# Altium PCB python project v2.0.PcbDoc (part 2 of 2)
Units mil, origin at the board's own origin, x right, y up, seen from the top; angles counter-clockwise.
Board outline 4842.52 x 1803.15 mil, 8 copper layers (L1, L2, L3(GND), L4(PWR), L5(GND), L6, L7, L8), stack 66.302 mil thick; 259 components, 287 nets, 1829 pads, 135 vias.
Unrouted connection lines stored in the file: 99.
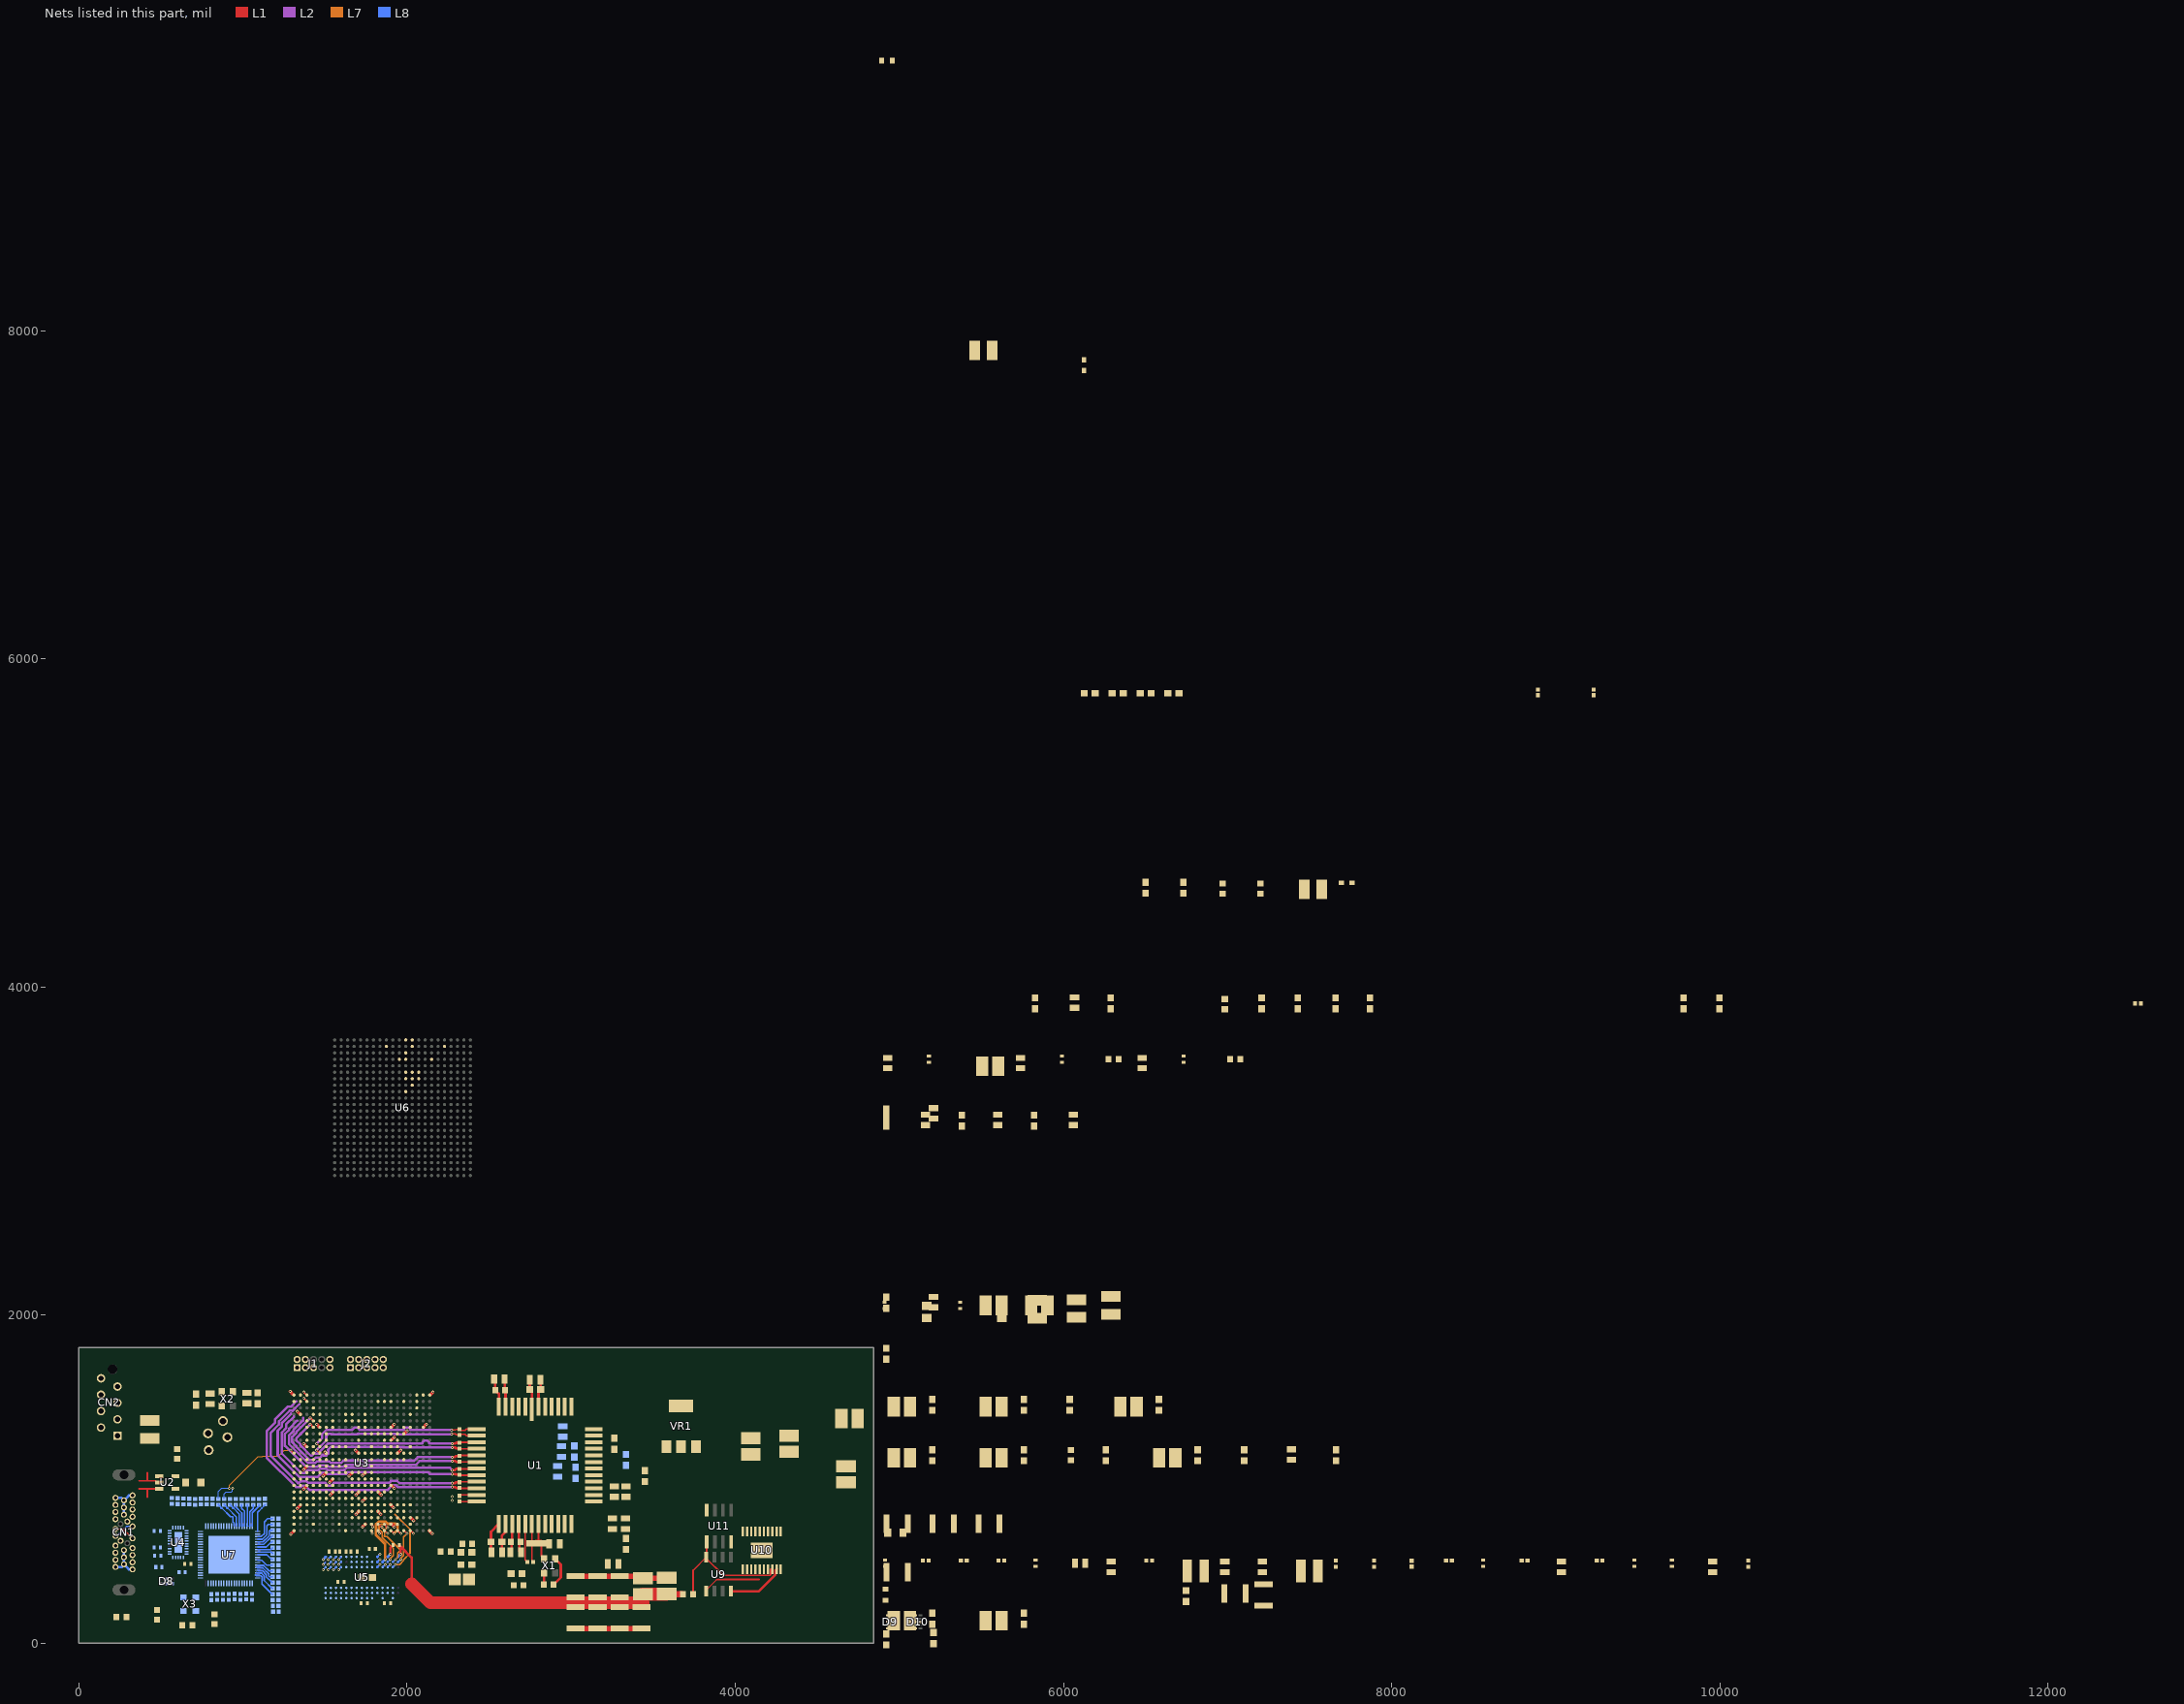
[diagram p7: the nets of this part, all layers, seen from the top]

## Part data
C1 C2 C7 C14 C22 C24 C26 C29 C31 C33 C38 C40 C41 C42 C43 C44 C45 C46 C47 C49 C54 C62 C64 C66 C68 C75 C76 C80 C81 C84 C85 C86 C87 C89 C91 C93 C96 C98 C105 C106 C111 C113 C115 C117 C119 C120 C121 C125 C126 C127 C128 C133 C135 C136 C145 C150 C159 C161 C162 C164 C170 C173 C176 C177 C180 C184 C186 L1 L2 L3 L4 L6 L7 L8 L9 L10 L11 L12 TP1 TP2 TP3 TP4 U2 X3: library part Component_1
  C1 C2 C7 C14 C22 C26 C29 C31 C33 C38 C40 C62 C80 C89 C91 C93 C96 C98 C106 C111 C135 C136 C145 C159 C161 C162 C164 C170 C173 C176 C177 C180 C184 C186: Buying URL=https://uk.farnell.com/avx/0603yc105kat2a/cap-1-f-16v-10-x7r-0603/dp/1658870RL?st=1u%200603, PCB Layer=0603
  C24 C41 C42 C81 C150: PCB Layer=CASEB
  C44 C45 C46 C47: Buying URL=https://uk.farnell.com/avx/06031c104kat2a/cap-0-1-f-100v-10-x7r-0603/dp/2749806?st=100nf, PCB footprint=0603
  C49 C54 C64 C66 C68 C75 C76 C84 C85 C86 C87 C113 C115 C117 C119 C120 C121 C125 C126 C127 C133: Buying URL=https://uk.farnell.com/avx/04023c104kat2a/cap-0-1-f-25v-10-x7r-0402/dp/1867948RL, PCB Stake=0402
  C105: Buying URL="NEED TO BE ADDED", PCB footprint=0805
  C128: Buying URL=https://uk.farnell.com/avx/04023c104kat2a/cap-0-1-f-25v-10-x7r-0402/dp/1867948RL
  L1 L2 L8 L9 L11 L12: Buying URL=https://uk.farnell.com/tdk/mlz1608m100wt/inductor-10uh-20-shielded/dp/2215635?st=10uH%200603, PCB Layout=0603
  L3: =IHLP5050-01, Buying URL=https://www.mouser.co.uk/ProductDetail/Coilcraft/XFL4015-471MEC?qs=zCSbvcPd3pYzCOJSVbeMnw==
  L4 L10: Buying URL=https://uk.farnell.com/murata/blm18pg330sn1d/ferrite-bead-0-025ohm-3a-0603/dp/1515742?st=Ferrite%2033R/100MHz,%2025%25,%203A,%2025mR,%200603
  L6 L7: Buying URL=https://www.mouser.co.uk/ProductDetail/Coilcraft/XFL4015-471MEC?qs=zCSbvcPd3pYzCOJSVbeMnw==
  TP1 TP2 TP3 TP4: Buying URL=https://www.toby.co.uk/pcb-hardware/test-points-and-pins/test-7cn-valcon-ceramic-body-loop-pcb-test-points/
  U2: Buying URL=https://uk.farnell.com/texas-instruments/tps73218dbvt/ldo-fixed-1-8v-150ma-sot-23-5/dp/2323599RL?st=TPS73218, PCB Footprint type=SOT23-5
  X3: Buying URL=https://uk.rs-online.com/web/p/crystal-units/9047562/, MF=ABM8G-30.000MHZ-18-D2Y-T, mf Company=ABM8G
C3 C4 C5 C8 C12 C15 C20 C25 C28 C30 C32 C37 C39 C59 C63 C67 C69 C70 C71 C72 C90 C92 C94 C95 C97 C112 C114 C116 C144 C185 C187: library part Component_1, PCB Package=0805, Buying URL=https://uk.farnell.com/avx/08053d475kat2a/cap-4-7-f-25v-10-x5r-0805/dp/1657932?st=4.7u%200805
C6 C11 C13 C18 C21 C23 C27 C36: library part Component_1, PCB Package type=0603, Buying URL=https://uk.farnell.com/murata/grm188r71h104ka93d/cap-0-1-f-50v-10-x7r-0603-reel/dp/2408527?st=GRM188R71H104KA93D
C9 C19 C34 C35 C118 C146 C147 C148 C149 C156 C160 C165 C172 C175 C179 C182 C183: library part Component_1, CASE="CASE B"
  C9 C19 C34 C35 C118 C146 C149 C156 C160 C165 C172 C175 C179 C182 C183: Buying URL=https://uk.farnell.com/avx/tajb107k006tnj/cap-tant-aec-q200-100uf-6-3v-case/dp/2893386?st=100u%20CASE%20B
  C147 C148: Buying URL=https://uk.farnell.com/panasonic-electronic-components/4tpe150mazb/cap-150-f-4v-20/dp/2354853?st=4TPC150M#
C16: library part Component_1, CASE Type=CASEA, Buying URL=https://uk.farnell.com/kemet/t491a106m004at/cap-tantalum-10uf-4v-case-a/dp/2676170?st=T491A106M004AT
C77 C78 C99 C100 C107 C108 C109 C110 C122 C138 C140 C142 C157: library part Component_1, PCB Package type=1210
CN1: library part 1-2295018-2, "Connector USB Type C RCP SMD 24 Terminal workable with USB 3.1,3.0 and 2.0 standards.", PCB Package type="smd USB type C connector", 3D Model=NA, Buying URL=https://uk.farnell.com/te-connectivity/1-2295018-2/usb-connector-3-1-type-c-rcpt/dp/2568946?st=USB%20TYPE%20C, Company=PhasePhotonics, Datasheet URL=http://www.farnell.com/datasheets/2292385.pdf?_ga=2.46605921.752270131.1548443175-886242363.1545409715&_gac=1.159200584.1547824021.Cj0KCQiAj4biBRC-ARIsAA4WaFgEVxY1DDQMjPmwclte-08yP6TbUPRUf-iJ2mTW08_wstvQJToLRRUaArGKEALw_wcB, Date created=30/01/2019, Designed by="Faheem Minhas", Last modified=30/01/2019, MF="TE Connectivity", MP=1-2295018-2, PCB footprint URL=https://www.snapeda.com/parts/1-2295018-2/TE%20Connectivity%20AMP%20Connectors/view-part/?ref=snap, Price="4.29 pound", TE_purchase_URL=https://www.te.com/usa-en/product-1-2295018-2.html?te_bu=Cor&te_type=disp&te_campaign=seda_glo_cor-seda-global-disp-prtnr-fy19-seda-model-bom-cta_sma-317_1&elqCampaignId=32493
CN2: library part Conn_TE_7-215079-8_eec, "CONN FMALE-ON-BRD 8POS VERT T/H", Buying URL=https://uk.farnell.com/amp-te-connectivity/7-215079-8/receptacle-idc-1-27mm-8way/dp/148593
D1: Color=Green, Forward Voltage="2.1 V", Manufacturer=KingBright, Manufacturer Part No.=KP-2012MGC, Creator="Ritesh Kanjee", Datasheet URL=http://za.rs-online.com/web/p/visible-leds/4663778/, Date created="18 February 2015", RS Stock No.=466-3778
D2: Color=Orange, Forward Voltage=1.85V, Manufacturer=KingBright, Manufacturer Part No.=KP-2012SEC, Creator="Ritesh Kanjee", Datasheet URL=http://za.rs-online.com/web/p/visible-leds/4663790/, Date created="18 February 2015", RS Stock No.=466-3790
D8 D9 D10: library part Component_1, Package Type=DQAR, Company="TEXES INSTRUMENTS", mf no.=TPD4E02B04DQAR
FB1 FB2 FB3: library part Component_1, Package Type=0402, Buying URL=https://uk.farnell.com/murata/blm15ax100sn1d/ferrite-bead-0402-0-015ohm-1-74a/dp/2443220?st=BLM15AX100SN1D
J1 J2: "IDC LOW PRO HDR 10P VERT HT BLACK", MF=hARWIN, MP=M50-3500542
R1 R3 R4 R16 R17 R19 R20 R21 R22 R23 R24 R28 R29 R30 R31 R62 R63 R67 R68: library part RP73D1J76R8BTDG, "Res Thin Film 0603 76.8 Ohm 0.1% 1/10W ±15ppm/°C Molded SMD Paper T/R", Package="0603 TE Connectivity / AMP", Availability=Unavailable, Design by=Faheem, MF="TE Connectivity / Holsworthy", MP=RP73D1J76R8BTDG, Price=None, SnapEDA_Link=https://www.snapeda.com/parts/RP73D1J76R8BTDG/TE%20Connectivity%20/%20Holsworthy/view-part/?ref=snap
  R1 R4 R28 R29 R30 R31: Buying URL=https://uk.farnell.com/vishay/crcw060347k0fkea/res-47k-1-0-1w-0603-thick-film/dp/1469811?st=47K%200603, foot print=0603
  R3: Buying URL=https://uk.farnell.com/vishay/crcw060347k0fkea/res-47k-1-0-1w-0603-thick-film/dp/1469811?st=47K%200603, foot print=2X0603
  R16 R67 R68: Buying URL=https://uk.farnell.com/vishay/crcw060310k0fkea/res-10k-1-0-1w-0603-thick-film/dp/1469748?st=CRCW060310K0FKEA, foot print=2X0603
  R17 R24: Buying URL=https://uk.farnell.com/vishay/crcw060310k0fkea/res-10k-1-0-1w-0603-thick-film/dp/1469748?st=CRCW060310K0FKEA, foot print=0603
  R19 R20 R21 R22: Buying URL=https://uk.farnell.com/vishay/crcw060310k0fkea/res-10k-1-0-1w-0603-thick-film/dp/1469748?st=CRCW060310K0FKEA, foot print=0402
  R23 R63: Buying URL=https://uk.farnell.com/te-connectivity/crgh0603f4k7/res-4k7-1-0-2w-0603-thick-film/dp/2332011?st=4.7K%200603, foot print=0603
  R62: Buying URL=https://uk.farnell.com/te-connectivity/crgh0603f4k7/res-4k7-1-0-2w-0603-thick-film/dp/2332011?st=4.7K%200603, foot print=2X0603
R2 R5 R6 R7 R8 R9 R10 R11 R12 R13 R14 R15 R18 R25 R26 R27 R33 R34 R35 R36 R37 R38 R39 R40 R41 R42 R43 R44 R45 R46 R47 R48 R49 R50 R51 R52 R53 R54 R55 R56 R57 R58 R59 R60 R61 R70 R71 R72 R73 R74 R75 R76 R77 R78 R79 R80 R81 R82 R83 R84 R85 R86: library part RP73D1J76R8BTDG, "Res Thin Film 0603 76.8 Ohm 0.1% 1/10W ±15ppm/°C Molded SMD Paper T/R", =YAGO, Buying URL=https://uk.farnell.com/yageo/rc0402fr-07100rl/res-100r-1-0-0625w-0402-thick/dp/9239111
  R2 R5 R6 R7 R8 R9 R10 R11 R12 R13 R14 R15 R18 R25 R26 R27 R34 R35 R36 R37 R38 R39 R40 R41 R42 R43 R44 R45 R46 R47 R48 R49 R50 R51 R52 R53 R54 R55 R56 R57 R58 R59 R60 R61 R70 R71 R72 R73 R74 R75 R76 R77 R78 R79 R80 R81 R82 R83 R84 R85: PCB footprint=0402
  R33 R86: PCB footprint=0805
U1: library part Component_1, "Python camera sensor. Having pixel output of 500 by 600.", Manufactured by=OnSemi, Package Type=LCC48, Part No.=NOIP1SN0500A-QDI, 3D Model=http://www.3dcontentcentral.com/secure/download-model.aspx?catalogid=171&id=343978, Buying URL=https://uk.farnell.com/on-semiconductor/noip1sn0500a-qdi/image-sensor-rbg-800-x-600-lcc/dp/2727907?ost=NOIP1SN0500A&ddkey=https%3Aen-GB%2FElement14_United_Kingdom%2Fsearch, Company=PhasePhotonics, Data Sheet URL=https://www.onsemi.com/pub/Collateral/NOIP1SN1300A-D.PDF, Date created=04/02/2019, Designer=Faheem, PCB footprint download=https://www.snapeda.com/parts/NOIP1SN0500A-QDI/ON%20Semiconductor/view-part/?ref=search&t=NOIP1SN0500A
U3 U6: library part Component_1, Package Type=F484, Part No.=10M25DAF484I7G
U4: "Super Speed Type-C DRP Port Controller USB 3.1 3.3V/5V T/R 30-Pin WQFN EP", Package="WQFN-30 Texas Instruments", Availability=Unavailable, MF="Texas Instruments", MP=HD3SS3220IRNHT, Price=None, SnapEDA_Link=https://www.snapeda.com/parts/HD3SS3220IRNHT/Texas%20Instruments/view-part/?ref=snap
U5: library part micron_ddr2_sdram, "DDR2 SDRAM with configuration of 64 Meg * 16 bits.", PCB Package type=FBGA, 3D Model="3D contenental", Byer URL=https://www.arrow.com/en/products/mt47h64m16hr-25h/micron-technology, Company=PhasePhotonics, Data Sheet URL=static6.arrow.com/aropdfconversion/e8a5cdd149c7439f33fcdfacad6c2c34fc62263c/mt47h64m16hr-25it.pdf, Date created=18-Janruary-2019, Designer="Faheem Minhas", Last modified=31/01/2019, PCB model=snapEDA
U7: "USB3.0 to 32bit FIFO Interface Bridge QFN76 Tray", Package Type=QFN76, Buying Link=https://uk.farnell.com/ftdi/ft601q-b-t/interface-bridge-usb3-0-to-fifo/dp/2748207?ost=FT601Q-B-T&krypto=%2Bo46xR1L3ajemxFu%2FmPcTNHTx8D7L9nNUVIECkvxkhOZpbouecPBthgwzqoaTTZTVuFe0pU8FARaKQxtxKXba%2BGhPr48jWFZB85DBJ1xakRmBa7tuyYQ%2FzYyjzqRoe3u&ddkey=https%3AInvalidCookie, Company=PhasePhotonics, Data Created=21-Janruary-2019, Data sheet Link=https://www.ftdichip.com/Support/Documents/DataSheets/ICs/DS_FT600Q-FT601Q%20IC%20Datasheet.pdf, Designer="Faheem Minhas"
U9: library part Component_1, "MOSFET Transistor, N Channel, 13.6 A, 30 V, 0.0091 ohm, 10 V, 1 V. Used with TPS51116.", Manufacturer=INFINEON, Buyer URL=https://uk.farnell.com/infineon/irf7821pbf/mosfet-n-logic-so-8/dp/1013495?ost=IRF7821PBF&ddkey=https%3Aen-GB%2FElement14_United_Kingdom%2Fsearch, Company=PhasePhotonics, Data Sheet URL=https://www.infineon.com/dgdl/irf7821pbf.pdf?fileId=5546d462533600a401535608d7f31d06, Designer=Faheem, Manufacturer Part No=IRF7821PBF
U10: "DC to DC Controller Single Output Synchronous Buck 3 Volt to 28 Volt Input 20-Pin HTSSOP EP", Manufacturer="Texas Instruments", Package="HTSSOP-20 Texas Instruments", Company=PhasePhotonics, Data Sheet=http://www.produktinfo.conrad.com/datenblaetter/1000000-1099999/001014812-da-01-en-IC_SYNC_BUCK_C_TPS51116PWPR_TSSOP_20_TID.pdf, Designer=Faheem, Digi-Key_Part_Number=296-17243-ND, Digi-Key_Purchase_URL=https://www.digikey.co.uk/product-detail/en/texas-instruments/TPS51116PWP/296-17243-ND/675984?utm_source=snapeda&utm_medium=aggregator&utm_campaign=symbol, Part Number=TPS51116PWP, SnapEDA_Link=https://www.snapeda.com/parts/TPS51116PWP/Texas%20Instruments/view-part/?ref=snap
U11: library part Component_1, "IRF7832TRPBF -  MOSFET Transistor, N Channel, 20 A, 30 V, 0.0031 ohm, 10 V, 2.32 V. Used with TPS51116.", Manufacturer=INFINEON, Manufacturer Part No=IRF7832TRPBF, Buyer URL=https://uk.farnell.com/infineon/irf7832trpbf/mosfet-n-ch-30v-20a-soic-8/dp/2468025?st=IRF7832, Company=PhasePhotonics, Data Sheet URL=http://www.farnell.com/datasheets/107881.pdf?_ga=2.7827060.752270131.1548443175-886242363.1545409715&_gac=1.221262314.1547824021.Cj0KCQiAj4biBRC-ARIsAA4WaFgEVxY1DDQMjPmwclte-08yP6TbUPRUf-iJ2mTW08_wstvQJToLRRUaArGKEALw_wcB, Designer=Faheem
VR1: "LDO Regulator Pos 1.25V to 13.5V 0.8A 4-Pin_3+Tab_ SOT-223 Tube", Package="SOT-223-4 Texas Instruments", Buying URL=https://uk.farnell.com/texas-instruments/reg1117-3-3/ic-v-reg-ldo-0-8a-3-3v-smd-1117/dp/1212355, Digi-Key_Part_Number=REG1117-ND, Digi-Key_Purchase_URL=https://www.digikey.co.uk/product-detail/en/texas-instruments/REG1117/REG1117-ND/251211?utm_source=snapeda&utm_medium=aggregator&utm_campaign=symbol, MF="Texas Instruments", MP=REG1117, PCB Layout=SOT223, SnapEDA_Link=https://www.snapeda.com/parts/REG1117/Texas%20Instruments/view-part/?ref=snap
X1: library part Component_1, Manufactured by=ABRACON, mf_part no.=ASFLMB-72.000MHZ-XY-T
X2: library part Component_1, Manufactured by=MICROCHIP, mf_part no.=DSC1001CL5-040.0000

## Via types
v1: diameter 17.72, hole 7.87, L1 to L8, 67 vias
v2: diameter 17.72, hole 7.87, L7 to L8, 42 vias
v3: diameter 17.72, hole 7.87, L1 to L2, 18 vias
v4: diameter 50/50/50/50/50 (per signal layer), hole 39.37, L1 to L8, 4 vias
v5: diameter 177.17, hole 137.8, L1 to L8, 4 vias

## Nets (pads, with @x,y where several pads share a name; then routed paths per layer and width w, separated by ;. In a path a pad name is that pad's centre, name@x,y a point inside that pad or via, vN(x,y) a via of type N, cw(c..) or ccw(c..) an arc to the next point about the centre after c; other vN are vias at no path point)
1V8: C5.2 C6.2 C12.2 C13.2 C16.1 C20.2 C21.2 C23.2 U1.6 U1.22 U1.26 U2.5 | length 363
  L1 w10: C20.2@2530.49,1610.24 C20.2@2537.4,1603.32 ; C13.2@2680.31,628.74 C13.2@2690.94,618.11
  L1 w15.75: C20.2@2537.4,1603.32 C21.2@2537.4,1543.31 2559.84,1520.87 U1.6@2559.84,1442.24 ; C13.2@2680.31,628.74 U1.22@2680.31,727.68 ; C13.2@2690.94,618.11 2685.04,612.2 2685.04,563.5 C12.2@2693.42,555.12
3V3: C22.2 C24.1 C37.2 C38.2 C39.2 C40.2 C42.1 C45.2 C89.2 C90.2 C91.2 C92.2 C93.2 C94.2 C118.1 C176.2 C184.2 C185.2 C186.2 C187.2 J1.4 J2.1 L1.1 L2.1 L8.1 L9.1 L11.1 R16.2 R17.2 R28.2 R29.2 R30.2 R62.2 R63.2 R81.2 U2.1 U2.3 U3.F9 U3.F11 U3.G10 U3.G11 U3.K7 U3.L6 U3.L7 U3.M6 U3.T9 U3.T10 U3.T11 U3.T12 U3.T13 U3.U8 U3.U9 U3.U11 U3.U12 U3.U14 U4.8 U6.F12 U6.F14 U6.G12 U6.G13 U6.G14 U7.14 U7.20 U7.49 U7.59 U7.68 VR1.2 VR1.4 X2.4 | length 150.1
  L1 w10.01: 367.44,941.14 U2.3@467.5,941.14 ; 417.47,891.07 417.47,941.14
3V3I: C11.2 C25.2 C26.2 C28.2 C29.2 C30.1 C31.1 C32.2 C33.2 C34.1 C35.1 C36.2 L1.2 U1.1 U1.19 U1.29 U1.36 X1.4 | length 449.8
  L1 w15.75: C30.1@2514.74,555.12 2511.81,558.05 C31.1@2511.81,618.11 2511.81,679.65 U1.19@2559.84,727.68 ; C32.2@2747.53,1606.3 2748.03,1605.8 C33.2@2748.03,1547.24 2760.63,1534.65 U1.1@2760.63,1426.5 ; C36.2@2834.65,358.27 X1.4@2834.65,429.13
3V3P: C1.2 C2.2 C3.2 C4.1 C7.2 C8.2 C9.1 C14.2 C15.2 C18.2 C19.1 L2.2 U1.31 U1.33 U1.38 U1.40
5V: C41.1 C44.2 C77.2 C78.2 C81.1 C111.2 C150.1 L4.1 L10.2 R33.2 U9.1 U10.15 VR1.3 | length 357.1
  L1 w10: U9.1@3822.64,317.52 3822.64,324.65 3887.76,389.76 4145.67,389.76
A0: U3.N14 U5.M8
A1: U3.N15 U5.M3 | length 22.3
  L8 w7.87: U5.M3@1850.39,464.57 v2(1866.14,480.31)
A2: U3.H22 U5.M7 | length 43.5
  L1 w10: U3.H22@1862.2,686.58 1864.61,686.58 v1(1881.89,669.29)
  L8 w7.87: v2@1490.16,482.28 1501.97,494.09
  other v2: 1488.19,480.32
A3: U3.H21 U5.N2 | length 387.9
  L1 w10: U3.H21@1862.2,725.95 1862.2,724.41 v1(1881.89,704.72)
  L7 w10: v1@1885.98,704.72 v1(1881.89,704.72) 1877.95,704.72 1873.39,700.16 ; v2(1897.64,511.81) 1897.64,518.14 1915.43,535.94 1915.43,578.53 1848.24,645.72 1848.24,661.66 1848.5,661.92 1848.5,676.66 1828.66,696.5 1828.66,716.03 1839.08,726.46 1860.16,726.46 1873.39,713.23 1873.39,700.16 ; 1873.39,700.16 1873.39,697.5 1872.06,698.83 1873.39,700.16
  L8 w10: U5.N2@1881.89,496.06 v2(1897.64,511.81)
A4: U3.K22 U5.N8 | length 20.3
  L1 w10: U3.K22@1783.46,686.58 1785.87,686.58 1787.4,685.04 v1(1787.4,669.29)
A5: U3.K21 U5.N3 | length 43.6
  L1 w10: U3.K21@1783.46,725.95 1785.87,725.95 1791.18,720.63 v1(1791.18,709.21)
  L8 w7.87: U5.N3@1881.89,464.57 v2(1897.64,480.31)
A6: U3.J22 U5.N7 | length 33.9
  L1 w10: U3.J22@1822.83,686.58 1840.12,669.29 v1(1830.7,669.29)
A7: U3.J21 U5.P2 | length 320.6
  L1 w10: U3.J21@1822.83,725.95 1825.24,725.95 1842.52,708.66 v1(1846.45,708.66)
  L7 w10: v1(1846.45,708.66) 1846.45,704.73 1859.45,691.73 1858.12,690.4 1858.12,686.75 1862.44,682.43 1862.44,656.15 1862.18,655.89 1862.18,651.5 1877.61,651.5 1960.63,568.47 1942.83,550.68 1942.83,525.51 v2(1929.13,511.81)
  L8 w10: U5.P2@1913.39,496.06 v2(1929.13,511.81)
A8: U3.G20 U5.P8
A9: U3.G19 U5.P3 | length 419.2
  L7 w10: 1925.2,787.4 2017.8,694.8 2017.8,549.29 1978.43,509.92 1978.43,504.44 1954.3,480.31 v2(1929.13,480.31)
  L8 w10: U5.P3@1913.39,464.57 v2(1929.13,480.31)
A10: U3.G22 U5.M2 | length 492.4
  L1 w10: U3.G22@1901.57,686.58 1903.98,686.58 v1(1921.26,669.29)
  L7 w15.75: v2(1866.14,511.81) 1866.14,604.05 1810.04,660.16 1810.04,686.32 1811.85,688.13 1811.85,726.93 1828.19,743.27 1867.12,743.27 1881.06,729.33 1929.82,729.33 1941.93,717.22 1941.93,689.96 v1(1921.26,669.29)
  L8 w15.75: U5.M2@1850.39,496.06 v2(1866.14,511.81)
A11: U3.F22 U5.P7 | length 26.8
  L1 w10: U3.F22@1940.94,686.58 1943.35,686.58 v1(1960.63,669.29)
A12: U3.E22 U5.R2 | length 222.9
  L1 w10: U3.E22@1980.31,686.58 1982.72,686.58 v1(2000,669.29)
  L7 w10: v2(1960.63,511.81) 1960.63,518.14 1978.43,535.94 1978.43,647.72 v1(2000,669.29)
  L8 w10: U5.R2@1944.88,496.06 v2(1960.63,511.81)
BA0: U3.F21 U5.L2 | length 22.3
  L8 w7.87: U5.L2@1818.9,496.06 v2(1834.65,511.81)
BA1: U3.F20 U5.L3 | length 22.3
  L8 w7.87: U5.L3@1818.9,464.57 v2(1834.65,480.31)
BA2: U3.D22 U5.L1 | length 49.1
  L1 w10: U3.D22@2019.69,686.58 2022.09,686.58 v1(2039.37,669.29)
  L8 w7.87: U5.L1@1818.9,527.56 v2(1834.65,543.31)
CAS_N: U3.F19 U5.L7
CC1: CN1.A5 U4.1
CC2: CN1.B5 U4.2
CK_N: U3.E18 U5.K8
CK_P: U3.D18 U5.J8
CKE: U3.L20 U5.K2
CLK: R43.2 U3.R11
CLK_72: R3.1 X1.3 | length 81.8
  L1 w10: 2818.9,590.98 2818.9,531.5 X1.3@2834.65,515.75
clk_n: R5.1 U1.7 U3.V9 | length 1084.3
  L1 w7.87: v3(2271.65,1299.21) 2293.21,1299.21 2298.9,1304.9 R5.1@2318.9,1304.9 ; R5.1@2325.55,1298.25 2354.21,1298.25 2361.79,1305.83 U1.7@2423.43,1305.83
  L1 w10: v3(1448.82,1216.54) 1450.35,1216.54 U3.V9@1468.5,1198.39
  L2 w15: v3(1448.82,1216.54) 1482.26,1249.98 1482.26,1274.67 1508.8,1301.2 1666.2,1301.2 1680.57,1315.57 1697.38,1315.57 1709.27,1303.68 1709.27,1299.21 1979.7,1299.21 1979.7,1303.68 1991.59,1315.57 2008.41,1315.57 2020.3,1303.68 2020.3,1299.21 v3(2271.65,1299.21)
clk_p: R5.2 U1.8 U3.V10 | length 1068.3
  L1 w7.87: v3(2271.65,1275.59) 2293.21,1275.59 2298.9,1269.9 R5.2@2318.9,1269.9 ; R5.2@2322.24,1273.25 2354.21,1273.25 2361.79,1265.67 U1.8@2423.43,1265.67
  L1 w10: v3(1448.82,1177.17) 1450.35,1177.17 U3.V10@1468.5,1159.02
  L1 w15: R5.2@2318.9,1269.9 R5.2@2322.24,1273.25
  L2 w15: v3(1448.82,1177.17) 1507.26,1235.61 1507.26,1264.31 1519.15,1276.2 1535.97,1276.2 1537.19,1274.98 1697.38,1274.98 1698.6,1276.2 1929.67,1276.2 1930.89,1274.98 2271.04,1274.98 v3(2271.65,1275.59)
CLKIN_N: R2.2 U1.23 U3.T5 | length 239.2
  L1 w10: U1.23@2718.72,725.93 U1.23@2720.47,727.68 2720.47,508.31 R2.2@2732.72,496.06
CLKIN_P: R2.1 U1.24 U3.T6 | length 241
  L1 w10: U1.24@2754.15,727.68 U1.24@2760.63,727.68 2760.63,503.15 R2.1@2767.72,496.06
CLKPLL: R4.1 U3.M9
CONF_DONE: J2.4 U3.F8
CONFIG_SEL: J2.8 U3.H10
CRC_ERROR: J2.6 U3.F7
CS_N: U3.E19 U5.L8
D_N: CN1.A7 CN1.B7 U7.25 | length 128.4
  L1 w10: CN1.B7@222.83,697.83 269.09,697.83 CN1.A7@327.17,639.76
D_P: CN1.A6 CN1.B6 U7.23 | length 128.4
  L8 w10: CN1.B6@222.83,654.53 233.27,654.53 291.34,712.6 CN1.A6@327.17,712.6
DATA_0: R77.2 U3.Y17
DATA_1: R76.2 U3.AA17
DATA_2: R75.2 U3.V11
DATA_3: R74.2 U3.V12
DATA_4: R73.2 U3.W11
DATA_5: R72.2 U3.Y11
DATA_6: R71.2 U3.R12
DATA_7: R61.2 U3.P12
DATA_8: R57.2 U3.AB10 | length 586.6
  L7 w3.94: v2(917.32,944.88) 917.32,964.57 1091.85,1139.09 1119.87,1139.09 1122.51,1141.73 1216.54,1141.73 1251.97,1177.17 1275.59,1177.17
  L8 w3.94: R57.2@850.39,879.7 850.39,925.2 870.08,944.88 v2(917.32,944.88)
DATA_9: R55.2 U3.AB11 | length 104.8
  L8 w3.94: R55.2@885.83,879.7 885.83,909.45 897.64,921.26 929.13,921.26 937.01,929.13 v1(937.01,944.88)
DATA_10: R53.2 U3.AA11
DATA_11: R51.2 U3.AA12
DATA_12: R49.2 U3.AB12
DATA_13: R47.2 U3.AB13
DATA_14: R45.2 U3.V13
DATA_15: R44.2 U3.W14
DATA_16: R42.2 U3.W12
DATA_17: R41.2 U3.W13
DATA_18: R40.2 U3.R13
DATA_19: R39.2 U3.P13
DATA_20: R38.2 U3.Y13
DATA_21: R37.2 U3.Y14
DATA_22: R36.2 U3.AA14
DATA_23: R35.2 U3.AB15
DATA_24: R34.2 U3.V14
DATA_25: R25.2 U3.W15
DATA_26: R18.2 U3.AA15
DATA_27: R15.2 U3.Y16
DATA_28: R14.2 U3.U15
DATA_29: R13.2 U3.V16
DATA_30: R12.2 U3.AB16
DATA_31: R11.2 U3.AA16
DEV_CLRn: J2.10 U3.D9
DEV_OE: J2.7 U3.D10
DOUT0_N: R6.1 U1.9 U3.W6 | length 1367.8
  L1 w7.87: v1@1410.98,1334.65 U3.W6@1429.13,1316.5
  L1 w10: R6.1@2318.9,1222.22 2322.19,1225.51 U1.9@2423.43,1225.51 U1.9@2423.43,1230
  L1 w15: v1(1409.45,1334.65) v1@1410.98,1334.65 ; v3(2275.59,1216.54) 2293.21,1216.54 2298.9,1222.22 R6.1@2318.9,1222.22
  L2 w15: v1(1409.45,1334.65) 1351.16,1276.36 1351.16,1274.67 1324.8,1248.31 1324.8,1238.19 1349.78,1213.21 1349.78,1208.13 1414.25,1143.66 1419.33,1143.66 1436.48,1160.81 1440.41,1156.87 1457.23,1156.87 1516.89,1216.54 2093.88,1216.54 2093.88,1224.94 2105.77,1236.83 2122.58,1236.83 2134.47,1224.94 2134.47,1216.54 v3(2275.59,1216.54)
DOUT0_P: R6.2 U1.10 U3.W5 | length 1449.4
  L1 w7.87: v3@1410.98,1374.02 U3.W5@1429.13,1355.87
  L1 w10: R6.2@2318.9,1187.22 2320.77,1185.35 U1.10@2423.43,1185.35
  L1 w15: v3(1409.45,1374.02) v3@1410.98,1374.02 ; v3(2275.59,1192.91) 2293.21,1192.91 2298.9,1187.22 R6.2@2318.9,1187.22
  L2 w15: v3(1409.45,1374.02) 1326.16,1290.73 1326.16,1285.02 1299.8,1258.66 1299.8,1227.83 1307.13,1220.51 1324.78,1202.85 1324.78,1197.77 1403.89,1118.66 1429.69,1118.66 1437.01,1125.98 1442.89,1131.87 1467.58,1131.87 1486.18,1150.47 1491.59,1145.06 1508.4,1145.06 1520.29,1156.95 1520.29,1173.76 1516.89,1177.16 1537.19,1197.46 1969.04,1197.46 1973.58,1192.91 v3(2275.59,1192.91)
DOUT1_N: R7.2 U1.11 U3.V4 | length 1411.1
  L1 w10: R7.2@2318.9,1141.73 2322.36,1145.2 U1.11@2423.43,1145.2
  L1 w15: v3(2275.59,1133.86) 2291.02,1133.86 2298.9,1141.73 R7.2@2318.9,1141.73
  L2 w15: 1366.14,1374.02 1366.14,1357.49 1307.22,1298.57 1307.22,1292.86 1280.87,1266.51 1280.87,1214.91 1396.05,1099.73 1442.04,1099.73 1451.23,1108.92 1525.15,1108.92 1534.34,1099.73 1599.52,1099.73 1612.65,1112.85 2043.13,1112.85 2064.13,1133.86 v3(2275.59,1133.86)
DOUT1_P: R7.1 U1.12 U3.V5 | length 1455.4
  L1 w10: v1(1291.34,1177.17) 1309.49,1159.02 ; R7.1@2318.9,1106.73 2320.59,1105.04 U1.12@2423.43,1105.04
  L1 w15: v3(2275.59,1110.24) 2295.39,1110.24 2298.9,1106.73 R7.1@2318.9,1106.73
  L2 w15: 1330.79,1357.49 1282.22,1308.93 1282.22,1303.22 1255.87,1276.86 1255.87,1204.55 1385.7,1074.73 1452.39,1074.73 1461.58,1083.92 1514.79,1083.92 1523.99,1074.73 1609.87,1074.73 1623,1087.85 2053.49,1087.85 2075.87,1110.24 v3(2275.59,1110.24)
DOUT2_N: R8.2 U1.13 U3.U6 | length 1521.1
  L1 w10: R8.2@2318.9,1062.99 2421.54,1062.99 U1.13@2423.43,1064.88
  L1 w15: v3(2275.59,1055.12) 2291.02,1055.12 2298.9,1062.99 R8.2@2318.9,1062.99
  L2 w15: 1311.02,1381.89 1263.29,1334.15 1263.29,1311.06 1236.93,1284.71 1236.93,1156.77 1354.94,1038.76 1378.49,1038.76 1395.51,1055.79 1460.24,1055.79 1469.43,1064.98 1506.95,1064.98 1516.14,1055.79 1617.72,1055.79 1630.84,1068.92 2261.79,1068.92 v3(2275.59,1055.12)
DOUT2_P: R8.1 U1.14 U3.U7 | length 1584.3
  L1 w10: R8.1@2318.9,1027.99 2322.17,1024.72 U1.14@2423.43,1024.72
  L1 w15: v3(2275.59,1031.5) 2277.09,1032.99 2295.89,1032.99 2295.89,1031 2298.9,1027.99 R8.1@2318.9,1027.99
  L2 w15: 1293.35,1399.57 1238.29,1344.51 1238.29,1321.42 1211.93,1295.06 1211.93,1146.42 1344.59,1013.76 1453.56,1013.76 1479.78,1039.98 1496.6,1039.98 1505.77,1030.81 1628.09,1030.81 1641.2,1043.92 2126.52,1043.92 2139.63,1030.81 2274.9,1030.81 v3(2275.59,1031.5)
DOUT3_N: R9.2 U1.15 U3.Y1 | length 1785
  L1 w7.87: v3(1370.08,1531.5) U3.Y1@1388.23,1513.35
  L1 w10: R9.2@2318.9,982.07 2321.4,984.57 U1.15@2423.43,984.57
  L1 w15: U3.Y1@1388.23,1513.35 U3.Y1@1389.76,1513.35 ; v3(2275.59,976.38) 2293.21,976.38 2298.9,982.07 R9.2@2318.9,982.07
  L2 w15: 1342.25,1456.96 1302.49,1417.2 1301.19,1418.5 1285.5,1418.5 1219.35,1352.35 1219.35,1334.06 1169.29,1284 1169.29,1141.73 1334.65,976.38 1341.45,976.38 1351.32,986.24 1388.84,986.24 1397.32,977.76 1501.42,977.76 1519.15,960.02 1535.97,960.02 1553.7,977.76 1890.08,977.76 1902.5,990.18 1940.02,990.18 1953.82,976.38 v3(2275.59,976.38)
DOUT3_P: R9.1 U1.16 U3.Y2 | length 1842.9
  L1 w7.87: v3@1372.82,1493.33 U3.Y2@1390.96,1475.18
  L1 w10: R9.1@2318.9,947.07 2321.56,944.41 U1.16@2423.43,944.41
  L1 w15: v3(2275.59,952.76) 2293.21,952.76 2298.9,947.07 R9.1@2318.9,947.07
  L2 w15: 1324.58,1474.64 1293.44,1443.5 1275.15,1443.5 1194.35,1362.71 1194.35,1344.41 1144.29,1294.35 1144.29,1131.38 1322.91,952.76 1353.19,952.76 1361.67,961.24 1378.49,961.24 1404.71,935.02 1882.7,935.02 1912.85,965.18 1929.67,965.18 1942.09,952.76 v3(2275.59,952.76)
  other v3: 1370.08,1493.66
DPCLK: J2.9 U3.E6
DQ0: U3.M15 U5.G8
DQ1: U3.M14 U5.G2
DQ2: U3.N18 U5.H7
DQ3: U3.M20 U5.H3
DQ4: U3.N20 U5.H1
DQ5: U3.M18 U5.H9
DQ6: U3.L18 U5.F1
DQ7: U3.L19 U5.F9
DQ8: U3.K18 U5.C8
DQ9: U3.J18 U5.C2 | length 22.3
  L8 w10: v2(1551.18,480.32) U5.C2@1566.93,496.06
DQ10: U3.K19 U5.D7
DQ11: U3.K20 U5.D3 | length 22.3
  L8 w10: v2(1582.68,448.82) U5.D3@1598.43,464.57
DQ12: U3.J14 U5.D1 | length 22.3
  L8 w10: v2(1582.68,511.81) U5.D1@1598.43,527.56
DQ13: U3.H19 U5.D9
DQ14: U3.H18 U5.B1 | length 16.7
  L8 w7.87: v2@1521.65,513.78 U5.B1@1533.46,525.59
  other v2: 1519.68,511.81
DQ15: U3.J20 U5.B9
GND: C1.1 C2.1 C3.1 C4.2 C5.1 C6.1 C7.1 C8.1 C9.2 C11.1 C12.1 C13.1 C14.1 C15.1 C16.2 C18.1 C19.2 C20.1 C21.1 C22.1 C23.1 C24.2 C25.1 C26.1 C27.1 C28.1 C29.1 C30.2 C31.2 C32.1 C33.1 C34.2 C35.2 C36.1 C37.1 C38.1 C39.1 C40.1 C41.2 C42.2 C43.2 C44.1 C45.1 C46.1 C47.1 C59.1 C62.1 C63.1 C64.1 C66.1 C67.1 C68.1 C69.1 C70.1 C71.1 C72.1 C76.1 C77.1 C78.1 C80.1 C81.2 C95.1 C97.1 C98.1 C99.1 C100.1 C105.1 C106.1 C107.1 C108.1 C109.1 C110.1 C111.1 C112.1 C113.1 C114.1 C115.1 C116.1 C117.1 C118.2 C119.2 C120.2 C121.2 C122.1 C125.2 C126.2 C127.2 C128.2 C133.2 C135.1 C136.1 C138.1 C140.1 C142.1 C144.1 C145.1 C146.2 C147.2 C148.2 C149.2 C150.2 C156.2 C157.1 C159.1 C160.2 C161.1 C162.1 C164.1 C165.2 C170.1 C172.2 C173.1 C175.2 C176.1 C177.1 C179.2 C180.1 C182.2 C183.2 C184.1 C185.1 CN1.A1 CN1.A12 CN1.B1 CN1.B12 CN1.G1 CN1.G2 CN1.G3 CN1.G4 CN1.G5 CN1.G6 CN2.1 D8.3 D8.8 D9.3 D9.8 D10.3 D10.8 J1.2 J1.10 J2.2 L12.1 R1.1 R24.1 R27.1 R31.1 R79.1 R80.1 R85.1 U1.5 U1.20 U1.21 U1.27 U1.30 U1.32 U1.34 U1.35 U1.37 U1.39 U1.48 U2.2 U3.A1 U3.A22 U3.AA4 U3.AA18 U3.AB1 U3.AB22 U3.B6 U3.D4 U3.D20 U3.E2 U3.E7 U3.F10 U3.G6 U3.G8 U3.G15 U3.G18 U3.G21 U3.J2 U3.J6 U3.J16 U3.J19 U3.K10 U3.K12 U3.L5 U3.L13 U3.L17 U3.L21 U3.M10 U3.M16 U3.M19 U3.N13 U3.P17 U3.R19 U3.R21 U3.T14 U3.T16 U3.U10 U3.U13 U3.V6 U3.V19 U3.W21 U3.Y9 U3.Y12 U3.Y15 U4.12 U4.13 U4.22 U4.28 U4.29 U4.31 U5.A3 U5.A7 U5.B2 U5.B8 U5.D2 U5.D8 U5.E3 U5.E7 U5.F2 U5.F8 U5.H2 U5.H8 U5.J3 U5.J7 U5.N1 U5.P9 U6.B9 U6.B13 U6.B18 U6.D11 U6.D16 U6.F13 U7.1 U7.26 U7.29 U7.36 U7.77 U10.3 U10.5 U10.6 U10.21 VR1.1 X1.2 X2.2 X3.2 X3.4 | length 4194.3
  L1 w10: C30.2@2575.81,543.31 C30.2@2578.74,546.24 ; C20.1@2594.49,1610.24 C20.1@2596.46,1608.27 ; C21.1@2596.46,1543.31 C21.1@2600,1539.76 ; U1.20@2600,678.74 U1.20@2600,727.68 ; C13.1@2637.8,612.2 C13.1@2631.89,618.11 C13.1@2640.16,626.38 ; C33.1@2800.79,1533.07 C33.1@2814.96,1547.24 ; C32.1@2811.53,1606.3 C32.1@2814.96,1602.87 ; C110.1@3027.56,409.45 C100.1@3161.42,409.45 C99.1@3295.28,409.45 3425.2,409.45 C148.2@3437.01,397.64 3580.71,397.64 C147.2@3582.68,399.61 ; C109.1@3161.42,90.55 C107.1@3295.28,90.55 C108.1@3429.13,90.55
  L1 w10.01: 367.44,991.2 U2.2@467.5,991.2 ; 417.47,991.2 417.47,1041.26
  L1 w15.75: v1(1897.64,543.31) 1897.64,581.99 C133.2@1914.07,598.43 ; C30.2@2578.74,555.12 C31.2@2578.74,618.11 2578.74,657.48 U1.20@2600,678.74 ; C21.1@2596.46,1543.31 C20.1@2596.46,1608.27 ; U1.5@2600,1442.24 C21.1@2600,1539.76 ; C12.1@2629.42,555.12 2637.8,563.5 C13.1@2637.8,612.2 ; C13.1@2640.16,626.38 U1.21@2640.16,727.68 ; U1.48@2800.79,1442.24 C33.1@2800.79,1533.07 ; C33.1@2814.96,1547.24 C32.1@2814.96,1602.87 ; C36.1@2893.7,358.27 2937.01,401.57 2937.01,480.32 X1.2@2901.57,515.75
  L1 w19.68: v1(1287.4,1535.43) U3.AB1@1305.55,1517.28 ; v1(1291.34,665.35) U3.AB22@1309.49,683.5 ; v1(1330.71,822.83) U3.AA18@1348.86,840.98 ; v1(1330.71,1413.39) 1332.24,1413.39 U3.AA4@1350.39,1395.24 ; v1(1370.08,940.94) U3.Y15@1388.23,959.09 ; v1(1370.08,1059.06) U3.Y12@1388.23,1077.2 ; v1(1370.08,1216.54) U3.Y9@1388.23,1198.39 ; v1(1448.82,1334.65) U3.V6@1466.97,1316.5 ; v1(1488.19,1019.68) U3.U13@1506.34,1037.83 ; v1(1500,1165.35) U3.U10@1506.34,1159.02 ; v1(1527.56,980.32) U3.T14@1545.71,998.46 ; v1(1531.5,905.51) U3.T16@1549.65,923.66 ; v1(1645.67,1019.68) U3.N13@1663.82,1037.83 ; v1(1685.04,1177.17) U3.M10@1703.19,1159.02 ; v1(1688.98,787.4) U3.M19@1707.13,805.55 ; v1(1688.98,905.51) U3.M16@1707.13,923.66 ; v1(1728.35,708.66) U3.L21@1746.5,726.81 ; v1(1728.35,866.14) U3.L17@1746.5,884.29 ; v1(1728.35,1023.62) U3.L13@1746.5,1041.77 ; U3.J19@1820.43,805.55 v1(1838.58,787.4) ; U3.J16@1824.37,923.66 v1(1842.52,905.51) ; U3.G18@1899.17,844.92 v1(1917.32,826.77) ; U3.G21@1903.11,726.81 v1(1921.26,708.66) ; U3.G15@1903.11,963.03 v1(1921.26,944.88) ; U3.G8@1903.11,1237.76 v1(1921.26,1255.91) ; U3.G6@1903.11,1316.5 v1(1921.26,1334.65) ; U3.F10@1942.48,1159.02 v1(1960.63,1177.17) ; U3.E7@1981.85,1277.13 v1(2000,1295.28) ; U3.D20@2021.22,766.18 v1(2039.37,748.03) ; U3.B6@2099.96,1316.5 v1(2118.11,1334.65) ; U3.A22@2135.39,687.44 v1(2153.54,669.29) ; U3.A1@2139.33,1513.35 v1(2157.48,1531.5)
  L1 w31.5: C122.1@3027.56,90.55 C109.1@3161.42,90.55 ; C110.1@3027.56,409.45 C100.1@3161.42,409.45 ; C100.1@3169.29,409.45 3303.15,409.45 C148.2@3437.01,409.45 ; C109.1@3196.85,90.55 C107.1@3330.71,90.55 ; C107.1@3303.15,90.55 C108.1@3437.01,90.55 ; C148.2@3448.82,397.64 C147.2@3582.68,397.64
  L8 w10: 259.25,886.81 CN1.G1@275,871.06 ; 262.8,465.55 275,477.76 CN1.G6@275,481.3 ; 305.51,450.79 CN1.A12@327.17,450.79 ; 305.51,901.57 CN1.A1@327.17,901.57 ; v2(1488.19,448.82) U5.A3@1503.94,464.57 ; v2(1519.68,480.32) U5.B2@1535.43,496.06 ; v2(1582.68,480.32) U5.D2@1598.43,496.06
  L8 w15.75: CN1.B1@222.83,465.55 262.8,465.55 ; CN1.B12@222.83,886.81 259.25,886.81 ; CN1.G4@275,567.91 CN1.G5@275,524.61 CN1.G6@275,481.3 305.51,450.79 ; CN1.G3@275,784.45 CN1.G2@275,827.76 CN1.G1@275,871.06 305.51,901.57 ; U5.N1@1881.89,527.56 v1(1897.64,543.31)
LDM: U3.N19 U5.F3
LDQS_N: U3.L15 U5.E8
LDQS_P: U3.L14 U5.F7
MISO0: U1.3 U3.V8
MON0: U1.44 U3.AA2
MON1: U1.45 U3.AA1
MOSI0: U1.2 U3.Y5
nCONFIG: J2.5 U3.H9
NetC27_2: C27.2 U2.4
NetC48_2: R17.1 R19.2 U7.15
NetC49_2: C49.2 U7.32
NetC52_2: U7.21 X3.1
NetC53_2: U7.22 X3.3
NetC54_2: C54.2 U7.31
NetC67_2: C67.2 L9.2
NetC68_2: C68.2
NetC69_2: C69.2 C70.2 C75.2 FB2.1 FB3.1 L6.2 L7.2 R82.2 R83.2 R84.2
NetC71_2: C71.2 C72.2 L11.2
NetC75_1: C75.1 R82.1 R85.2
NetC76_2: C76.2
NetC84_2: C84.2 U4.17
NetC85_2: C85.2 U4.16
NetC86_2: C86.2 U4.21
NetC87_2: C87.2 U4.20
NetC89_1: C89.1 C90.1
NetC91_1: C91.1 C92.1
NetC93_1: C93.1 C94.1
NetC96_1: C96.1 L3.1 U9.8 U10.18 U11.1 | length 840.5
  L1 w10: L3.1@3743.5,299.21 3743.5,445.87 U9.8@3822.64,525 ; U11.1@3825.2,618.11 3825.2,527.56 U9.8@3822.64,525 ; U10.18@4225.42,451.93 4215.35,451.93 4215.35,419.23 4210.12,413.99 3926.52,413.99 3822.64,517.87 U9.8@3822.64,525
NetC96_2: C96.2 U10.20
NetC151_2: L10.1
NetC186_1: C186.1 C187.1
NetCN1_A4: CN1.A4 CN1.A9 CN1.B4 CN1.B9
NetCN2_2: CN2.2
NetCN2_3: CN2.3 U6.C12
NetCN2_4: CN2.4 U6.D12
NetCN2_5: CN2.5 U6.A12
NetCN2_6: CN2.6 U6.A13
NetCN2_7: CN2.7 U6.J12
NetCN2_8: CN2.8 U6.H13
NetD1_2: D1.2
NetD2_2: D2.2
NetD3_1: U3.AA13
NetD4_1: U3.AB14
NetL5_1: 
NetL6_1: L6.1
NetL7_1: L7.1
NetL12_2: L12.2 U3.C1
NetR1_2: R1.2 U1.28
NetR3_2: R3.2 R4.2 U1.25 | length 137.3
  L1 w10: R3.2@2783.46,625.98 R3.2@2801.18,625.98 ; U1.25@2800.79,727.68 2800.79,626.38 R3.2@2801.18,625.98 ; 2818.9,625.98 R3.2@2801.18,625.98
NetR11_1: R11.1 U7.76
NetR12_1: R12.1 U7.75 | length 179.7
  L8 w10: U7.75@1076.46,416.5 1079.2,416.5 1082.35,413.35 1101.54,413.35 1101.54,411.54 1110.24,411.54 1115.47,406.3 1115.47,362.2 1178.46,299.21 R12.1@1180.67,299.21
NetR13_1: R13.1 U7.74 | length 156.5
  L8 w10: U7.74@1082.23,432.24 1083.16,432.24 1086.31,429.09 1101.54,429.09 1101.54,427.28 1114.2,427.28 1129.41,412.07 1129.41,383.7 1178.46,334.65 R13.1@1180.67,334.65
NetR14_1: R14.1 U7.73 | length 130.5
  L8 w10: U7.73@1089.61,445.51 1092.09,443.03 1118.16,443.03 1143.35,417.85 1143.35,403.87 1157.91,389.31 1159.67,389.31 1178.9,370.08 R14.1@1180.67,370.08
NetR15_1: R15.1 U7.72 | length 131.2
  L8 w10: U7.72@1082.23,463.74 1083.16,463.74 1086.31,460.59 1120.31,460.59 1157.28,423.62 1157.28,409.65 1161.42,405.51 R15.1@1181.1,405.51
NetR16_1: R16.1 R20.2 U7.16
NetR18_1: R18.1 U7.71 | length 106.4
  L8 w10: U7.71@1089.61,477.01 1092.09,474.53 1126.08,474.53 1159.67,440.95 R18.1@1181.1,440.95
NetR19_1: R19.1 U3.AB21
NetR20_1: R20.1 U3.W16
NetR21_1: R21.1 U3.V15
NetR21_2: R21.2 U7.17
NetR22_1: R22.1 U3.AB20
NetR22_2: R22.2 U7.18
NetR23_1: R23.1 U7.37
NetR24_2: R24.2 U7.27
NetR25_1: R25.1 U7.70
NetR26_1: R26.1 U3.U18
NetR27_2: R27.2 U3.U17
NetR30_1: R30.1 U3.K9
NetR33_1: R33.1 R86.2 U10.8 U10.10 U10.14
NetR34_1: R34.1 U7.69 | length 104.8
  L8 w10: U7.69@1089.61,508.5 1092.09,506.02 1114.3,506.02 1143.94,476.38 R34.1@1181.1,476.38
NetR35_1: R35.1 U7.67 | length 103.2
  L8 w10: U7.67@1089.61,540 1145.47,540 1173.66,511.81 R35.1@1181.1,511.81
NetR36_1: R36.1 U7.66 | length 95
  L8 w10: U7.66@1089.61,555.75 1172.6,555.75 R36.1@1181.1,547.24
NetR37_1: R37.1 U7.65 | length 96.1
  L8 w10: U7.65@1089.61,571.5 1169.92,571.5 R37.1@1181.1,582.68
NetR38_1: R38.1 U7.64 | length 104.3
  L8 w10: U7.64@1089.61,587.24 1142.8,587.24 1173.66,618.11 R38.1@1181.1,618.11
NetR39_1: R39.1 U7.63 | length 112.4
  L8 w10: U7.63@1089.61,602.99 1126.66,602.99 1177.22,653.54 R39.1@1181.1,653.54
NetR40_1: R40.1 U7.62 | length 136.7
  L8 w10: U7.62@1089.61,618.74 1122.7,618.74 1159.61,655.64 1159.61,683.23 1165.35,688.98 R40.1@1181.1,688.98
NetR41_1: R41.1 U7.61 | length 161
  L8 w10: U7.61@1089.61,634.49 1118.74,634.49 1145.67,661.42 1145.67,716.54 1153.54,724.41 R41.1@1181.1,724.41
NetR42_1: R42.1 U7.60 | length 178.4
  L8 w10: U7.60@1089.61,650.24 1110.87,650.24 1129.92,669.29 1129.92,740.16 1149.61,759.84 R42.1@1181.1,759.84
NetR43_1: R43.1 U7.58 | length 183.1
  L8 w10: U7.58@1089.61,681.73 1089.61,798.27 1114.61,823.27 ; 1114.63,823.27 1133.86,842.5 R43.1@1133.86,846.46
NetR44_1: R44.1 U7.57 | length 147.4
  L8 w10: U7.57@1056.73,714.61 1056.73,795.57 1098.43,837.26 R44.1@1098.43,844.7
NetR45_1: R45.1 U7.56 | length 139.2
  L8 w10: U7.56@1040.98,714.61 1042.8,716.42 1042.8,801.34 1062.99,821.54 R45.1@1062.99,844.7
NetR46_1: R46.1 U3.W18
NetR46_2: R46.2 U7.4
NetR47_1: R47.1 U7.55 | length 131.1
  L8 w10: U7.55@1025.24,714.61 1027.05,716.42 1027.05,844.19 R47.1@1027.56,844.7
NetR48_1: R48.1 U3.Y19
NetR48_2: R48.2 U7.5
NetR49_1: R49.1 U7.54 | length 137.3
  L8 w10: R49.1@992.13,844.7 992.13,822.83 1009.49,805.47 U7.54@1009.49,714.61
NetR50_1: R50.1 U3.Y18
NetR50_2: R50.2 U7.6
NetR51_1: R51.1 U7.53 | length 145.4
  L8 w10: R51.1@956.69,844.7 956.69,830.71 993.74,793.66 U7.53@993.74,714.61
NetR52_1: R52.1 U3.AA19
NetR52_2: R52.2 U7.7
NetR53_1: R53.1 U7.52 | length 158
  L8 w10: R53.1@921.26,844.7 935.26,830.71 935.26,823.27 942.7,823.27 977.99,787.97 U7.52@977.99,714.61
NetR54_1: R54.1 U3.AB18
NetR54_2: R54.2 U7.8
NetR55_1: R55.1 U7.51 | length 166.1
  L8 w10: R55.1@885.83,844.7 899.82,830.71 899.82,823.27 907.26,823.27 959.76,770.77 959.76,717.09 U7.51@962.24,714.61
NetR56_1: R56.1 U3.AB17
NetR56_2: R56.2 U7.9
NetR57_1: R57.1 U7.50 | length 184.3
  L8 w10: R57.1@850.39,844.7 864.39,830.71 864.39,823.27 871.83,823.27 923.45,771.65 939.17,771.65 939.17,740.08 944.02,735.24 944.02,717.09 945.83,715.28 U7.50@945.83,717.09
NetR58_1: R58.1 U3.V17
NetR58_2: R58.2 U7.10
NetR59_1: R59.1 U3.W17
NetR59_2: R59.2 U7.11
NetR60_1: R60.1 U3.AA20
NetR60_2: R60.2 U7.12
NetR61_1: R61.1 U7.47
NetR62_1: R62.1 U3.N4 U4.25
NetR63_1: R63.1 U3.N5 U4.26
NetR64_1: U3.P4 U4.24
NetR65_1: U3.P5 U4.27
NetR66_1: U3.M8 U4.23
NetR67_1: R67.1 U4.5
NetR68_1: R68.1 U4.3
NetR69_1: U4.11
NetR70_1: R70.1 U3.AB19
NetR70_2: R70.2 U7.13
NetR71_1: R71.1 U7.46
NetR72_1: R72.1 U7.45
NetR73_1: R73.1 U7.44
NetR74_1: R74.1 U7.43
NetR75_1: R75.1 U7.42
NetR76_1: R76.1 U7.41
NetR77_1: R77.1 U7.40
NetR78_1: R78.1 R80.2
NetR79_2: R79.2
NetR81_1: R81.1
NetR83_1: R83.1
NetR84_1: R84.1
NetR86_1: R86.1 U3.AB2 U10.13
NetR87_1: U3.B1
NetR88_1: U3.C3
NetR89_1: U3.C2
NetTP1_1: TP1.1 U3.E11
  other v4: 877.95,1354.33
NetTP2_1: TP2.1 U3.E10
  other v4: 787.4,1279.53
NetTP3_1: TP3.1 U3.J10
  other v4: 791.34,1177.17
NetTP4_1: TP4.1 U3.H11
  other v4: 905.51,1255.91
NetU3_D6: U3.D6
NetU3_P11: U3.P11 X2.3
NetU3_W9: U3.W9 U10.12
NetU3_W10: U3.W10 U10.11
NetU9_4: U9.4 U10.19 | length 350.1
  L1 w15.75: U9.4@3972.64,317.52 4143.71,317.52 4244.23,418.04 4244.23,444.74 U10.19@4251.42,451.93
NetU10_16: U10.16 U11.8
NetU10_17: U10.17 U11.4
nSTATUS: J2.3 U3.G9
ODT: U3.C20 U5.K9
RAS_N: U3.F18 U5.K7
RID_N: D8.5 U4.10 U7.35
RID_P: D8.4 U4.9 U7.34
RSTN: U1.46 U3.R9
RX1_N: CN1.A10 D9.1 U4.14
RX1_P: CN1.A11 D9.2 U4.15
RX2_N: CN1.B10 D10.1 U4.18
RX2_P: CN1.B11 D10.2 U4.19
SCK0: U1.4 U3.V7
SSN0: U1.47 U3.Y6
SYNC_N: R10.2 U1.17 U3.W4 | length 106.5
  L1 w10: R10.2@2318.9,899.39 2323.76,904.25 U1.17@2423.43,904.25
  other v3: 2275.59,893.7
SYNC_P: R10.1 U1.18 U3.W3 | length 104.6
  L1 w10: R10.1@2318.9,864.39 2319.19,864.09 U1.18@2423.43,864.09
  other v3: 2275.59,870.08
TCK: J1.1 R31.2 U3.G2
TDI: J1.9 R29.1 U3.L4
TDO: J1.3 U3.M5
TMS: J1.5 R28.1 U3.H2
TOD_N: C54.1 D8.2 U4.7
TOD_P: C49.1 D8.1 U4.6
TRG0: U1.41 U3.P9
TRG1: U1.42 U3.Y7
TRG2: U1.43 U3.Y8
TX1_N: C85.1 CN1.B3 D9.4
TX1_P: C84.1 CN1.B2 D9.5
TX2_N: C87.1 CN1.A3 D10.4
TX2_P: C86.1 CN1.A2 D10.5
UDM: U3.J15 U5.B3 | length 22.3
  L8 w10: v2(1519.68,448.82) U5.B3@1535.43,464.57
UDQS_N: U3.K15 U5.A8
UDQS_P: U3.K14 U5.B7
VBUS: L4.2 R23.2 R67.2 R68.2 U4.30
VCC: C112.2 C113.2 C164.2 C165.1 C177.2 C179.1 C180.2 C182.1 U3.K11 U3.K13 U3.L10 U3.L11 U3.L12 U3.M11 U3.M12 U3.M13
VCC33: C43.1 C46.2 C47.2 D1.1 D2.1 L8.2 U7.24 U7.28 U7.38
VCCA: C63.2 C66.2 FB1.1 R78.2
VCCA_ADC: C64.2 FB1.2
VCCA_PLL: C80.2 C105.2 C106.2 C146.1 C159.2 C160.1 C183.1 U3.H7 U3.H8 U3.H15 U3.T15
VCCD_PLL: C114.2 C115.2 C149.1 C156.1 C162.2 C170.2 C172.1 C173.2 C175.1 FB2.2 U3.G7 U3.G16 U3.J7 U3.U16
VCCINT: C116.2 C117.2 FB3.2
VD10: C59.2 C62.2 U7.2 U7.3 U7.30 U7.33 U7.39 U7.48
VDD: C99.2 C100.2 C107.2 C108.2 C109.2 C110.2 C119.1 C120.1 C121.1 C122.2 C125.1 C126.1 C127.1 C128.1 C133.1 C138.2 C140.2 C142.2 C147.1 C148.1 C157.2 L3.2 U3.H16 U3.J17 U3.K16 U3.K17 U3.L16 U3.M17 U3.N16 U3.N17 U3.P16 U3.R16 U3.R17 U3.T17 U5.A1 U5.A9 U5.C1 U5.C3 U5.C7 U5.C9 U5.E1 U5.E9 U5.G1 U5.G3 U5.G7 U5.G9 U5.J1 U5.J9 U5.M9 U5.R1 U10.1 U10.9 | length 2097.7
  L1 w15.75: C133.1@1952.07,598.43 C133.1@1960.63,589.87 ; v1(1960.63,543.31) C133.1@1960.63,589.87 ; 2027.56,362.2 2027.56,522.94 C133.1@1960.63,589.87 ; C147.1@3582.68,301.18 C147.1@3584.65,299.21
  L1 w39.37: C147.1@3584.65,299.21 3608.91,299.21 3657.43,299.21 L3.2@3673.23,299.21
  L1 w78.74: 2027.56,362.2 2141.73,248.03 3437.01,248.03 ; C148.1@3437.01,299.21 3580.71,299.21 C147.1@3582.68,301.18
  L8 w10: v2(1551.18,448.82) U5.C3@1566.93,464.57 ; v2(1551.18,511.81) U5.C1@1566.93,527.56
  L8 w15.75: v2(1488.19,511.81) U5.A1@1503.94,527.56 ; U5.R1@1944.88,527.56 v1(1960.63,543.31)
VDD5: 
VREF: C98.2 C135.2 C145.2 C161.2 U3.D21 U3.P22 U5.J2 U10.7
VTT: C95.2 C97.2 C136.2 C144.2 R26.2 U10.2 U10.4
WE_N: U3.E20 U5.K3
pads on no net: CN1.1 CN1.2 CN1.A8 CN1.B8 CN2. D8.6 D8.7 D8.9 D8.10 D9.6 D9.7 D9.9 D9.10 D10.6 D10.7 D10.9 D10.10 J1.6 J1.7 J1.8 U3.A2 U3.A3 U3.A4 U3.A5 U3.A6 U3.A7 U3.A8 U3.A9 U3.A10 U3.A11 U3.A12 U3.A13 U3.A14 U3.A15 U3.A16 U3.A17 U3.A18 U3.A19 U3.A20 U3.A21 U3.AA3 U3.AA5 U3.AA6 U3.AA7 U3.AA8 U3.AA9 U3.AA10 U3.AA21 U3.AA22 U3.AB3 U3.AB4 U3.AB5 U3.AB6 U3.AB7 U3.AB8 U3.AB9 U3.B2 U3.B3 U3.B4 U3.B5 U3.B7 U3.B8 U3.B9 U3.B10 U3.B11 U3.B12 U3.B13 U3.B14 U3.B15 U3.B16 U3.B17 U3.B18 U3.B19 U3.B20 U3.B21 U3.B22 U3.C4 U3.C5 U3.C6 U3.C7 U3.C8 U3.C9 U3.C10 U3.C11 U3.C12 U3.C13 U3.C14 U3.C15 U3.C16 U3.C17 U3.C18 U3.C19 U3.C21 U3.C22 U3.D1 U3.D2 U3.D3 U3.D5 U3.D7 U3.D8 U3.D11 U3.D12 U3.D13 U3.D14 U3.D15 U3.D16 U3.D17 U3.D19 U3.E1 U3.E3 U3.E4 U3.E5 U3.E8 U3.E9 U3.E12 U3.E13 U3.E14 U3.E15 U3.E16 U3.E17 U3.E21 U3.F1 U3.F2 U3.F3 U3.F4 U3.F5 U3.F6 U3.F12 U3.F13 U3.F14 U3.F15 U3.F16 U3.F17 U3.G1 U3.G3 U3.G4 U3.G5 U3.G12 U3.G13 U3.G14 U3.G17 U3.H1 U3.H3 U3.H4 U3.H5 U3.H6 U3.H12 U3.H13 U3.H14 U3.H17 U3.H20 U3.J1 U3.J3 U3.J4 U3.J5 U3.J8 U3.J9 U3.J11 U3.J12 U3.J13 U3.K1 U3.K2 U3.K3 U3.K4 U3.K5 U3.K6 U3.K8 U3.L1 U3.L2 U3.L3 U3.L8 U3.L9 U3.L22 U3.M1 U3.M2 U3.M3 U3.M4 U3.M7 U3.M21 U3.M22 U3.N1 U3.N2 U3.N3 U3.N6 U3.N7 U3.N8 U3.N9 U3.N10 U3.N11 U3.N12 U3.N21 U3.N22 U3.P1 U3.P2 U3.P3 U3.P6 U3.P7 U3.P8 U3.P10 U3.P14 U3.P15 U3.P18 U3.P19 U3.P20 U3.P21 U3.R1 U3.R2 U3.R3 U3.R4 U3.R5 U3.R6 U3.R7 U3.R8 U3.R10 U3.R14 U3.R15 U3.R18 U3.R20 U3.R22 U3.T1 U3.T2 U3.T3 U3.T4 U3.T7 U3.T8 U3.T18 U3.T19 U3.T20 U3.T21 U3.T22 U3.U1 U3.U2 U3.U3 U3.U4 U3.U5 U3.U19 U3.U20 U3.U21 U3.U22 U3.V1 U3.V2 U3.V3 U3.V18 U3.V20 U3.V21 U3.V22 U3.W1 U3.W2 U3.W7 U3.W8 U3.W19 U3.W20 U3.W22 U3.Y3 U3.Y4 U3.Y10 U3.Y20 U3.Y21 U3.Y22 U4.4 U5.A2 U5.E2 U5.R3 U5.R7 U5.R8 U6.A1 U6.A2 U6.A3 U6.A4 U6.A5 U6.A6 U6.A7 U6.A8 U6.A9 U6.A10 U6.A11 U6.A14 U6.A15 U6.A16 U6.A17 U6.A18 U6.A19 U6.A20 U6.A21 U6.A22 U6.AA1 U6.AA2 U6.AA3 U6.AA4 U6.AA5 U6.AA6 U6.AA7 U6.AA8 U6.AA9 U6.AA10 U6.AA11 U6.AA12 U6.AA13 U6.AA14 U6.AA15 U6.AA16 U6.AA17 U6.AA18 U6.AA19 U6.AA20 U6.AA21 U6.AA22 U6.AB1 U6.AB2 U6.AB3 U6.AB4 U6.AB5 U6.AB6 U6.AB7 U6.AB8 U6.AB9 U6.AB10 U6.AB11 U6.AB12 U6.AB13 U6.AB14 U6.AB15 U6.AB16 U6.AB17 U6.AB18 U6.AB19 U6.AB20 U6.AB21 U6.AB22 U6.B1 U6.B2 U6.B3 U6.B4 U6.B5 U6.B6 U6.B7 U6.B8 U6.B10 U6.B11 U6.B12 U6.B14 U6.B15 U6.B16 U6.B17 U6.B19 U6.B20 U6.B21 U6.B22 U6.C1 U6.C2 U6.C3 U6.C4 U6.C5 U6.C6 U6.C7 U6.C8 U6.C9 U6.C10 U6.C11 U6.C13 U6.C14 U6.C15 U6.C16 U6.C17 U6.C18 U6.C19 U6.C20 U6.C21 U6.C22 U6.D1 U6.D2 U6.D3 U6.D4 U6.D5 U6.D6 U6.D7 U6.D8 U6.D9 U6.D10 U6.D13 U6.D14 U6.D15 U6.D17 U6.D18 U6.D19 U6.D20 U6.D21 U6.D22 U6.E1 U6.E2 U6.E3 U6.E4 U6.E5 U6.E6 U6.E7 U6.E8 U6.E9 U6.E10 U6.E11 U6.E12 U6.E13 U6.E14 U6.E15 U6.E16 U6.E17 U6.E18 U6.E19 U6.E20 U6.E21 U6.E22 U6.F1 U6.F2 U6.F3 U6.F4 U6.F5 U6.F6 U6.F7 U6.F8 U6.F9 U6.F10 U6.F11 U6.F15 U6.F16 U6.F17 U6.F18 U6.F19 U6.F20 U6.F21 U6.F22 U6.G1 U6.G2 U6.G3 U6.G4 U6.G5 U6.G6 U6.G7 U6.G8 U6.G9 U6.G10 U6.G11 U6.G15 U6.G16 U6.G17 U6.G18 U6.G19 U6.G20 U6.G21 U6.G22 U6.H1 U6.H2 U6.H3 U6.H4 U6.H5 U6.H6 U6.H7 U6.H8 U6.H9 U6.H10 U6.H11 U6.H12 U6.H14 U6.H15 U6.H16 U6.H17 U6.H18 U6.H19 U6.H20 U6.H21 U6.H22 U6.J1 U6.J2 U6.J3 U6.J4 U6.J5 U6.J6 U6.J7 U6.J8 U6.J9 U6.J10 U6.J11 U6.J13 U6.J14 U6.J15 U6.J16 U6.J17 U6.J18 U6.J19 U6.J20 U6.J21 U6.J22 U6.K1 U6.K2 U6.K3 U6.K4 U6.K5 U6.K6 U6.K7 U6.K8 U6.K9 U6.K10 U6.K11 U6.K12 U6.K13 U6.K14 U6.K15 U6.K16 U6.K17 U6.K18 U6.K19 U6.K20 U6.K21 U6.K22 U6.L1 U6.L2 U6.L3 U6.L4 U6.L5 U6.L6 U6.L7 U6.L8 U6.L9 U6.L10 U6.L11 U6.L12 U6.L13 U6.L14 U6.L15 U6.L16 U6.L17 U6.L18 U6.L19 U6.L20 U6.L21 U6.L22 U6.M1 U6.M2 U6.M3 U6.M4 U6.M5 U6.M6 U6.M7 U6.M8 U6.M9 U6.M10 U6.M11 U6.M12 U6.M13 U6.M14 U6.M15 U6.M16 U6.M17 U6.M18 U6.M19 U6.M20 U6.M21 U6.M22 U6.N1 U6.N2 U6.N3 U6.N4 U6.N5 U6.N6 U6.N7 U6.N8 U6.N9 U6.N10 U6.N11 U6.N12 U6.N13 U6.N14 U6.N15 U6.N16 U6.N17 U6.N18 U6.N19 U6.N20 U6.N21 U6.N22 U6.P1 U6.P2 U6.P3 U6.P4 U6.P5 U6.P6 U6.P7 U6.P8 U6.P9 U6.P10 U6.P11 U6.P12 U6.P13 U6.P14 U6.P15 U6.P16 U6.P17 U6.P18 U6.P19 U6.P20 U6.P21 U6.P22 U6.R1 U6.R2 U6.R3 U6.R4 U6.R5 U6.R6 U6.R7 U6.R8 U6.R9 U6.R10 U6.R11 U6.R12 U6.R13 U6.R14 U6.R15 U6.R16 U6.R17 U6.R18 U6.R19 U6.R20 U6.R21 U6.R22 U6.T1 U6.T2 U6.T3 U6.T4 U6.T5 U6.T6 U6.T7 U6.T8 U6.T9 U6.T10 U6.T11 U6.T12 U6.T13 U6.T14 U6.T15 U6.T16 U6.T17 U6.T18 U6.T19 U6.T20 U6.T21 U6.T22 U6.U1 U6.U2 U6.U3 U6.U4 U6.U5 U6.U6 U6.U7 U6.U8 U6.U9 U6.U10 U6.U11 U6.U12 U6.U13 U6.U14 U6.U15 U6.U16 U6.U17 U6.U18 U6.U19 U6.U20 U6.U21 U6.U22 U6.V1 U6.V2 U6.V3 U6.V4 U6.V5 U6.V6 U6.V7 U6.V8 U6.V9 U6.V10 U6.V11 U6.V12 U6.V13 U6.V14 U6.V15 U6.V16 U6.V17 U6.V18 U6.V19 U6.V20 U6.V21 U6.V22 U6.W1 U6.W2 U6.W3 U6.W4 U6.W5 U6.W6 U6.W7 U6.W8 U6.W9 U6.W10 U6.W11 U6.W12 U6.W13 U6.W14 U6.W15 U6.W16 U6.W17 U6.W18 U6.W19 U6.W20 U6.W21 U6.W22 U6.Y1 U6.Y2 U6.Y3 U6.Y4 U6.Y5 U6.Y6 U6.Y7 U6.Y8 U6.Y9 U6.Y10 U6.Y11 U6.Y12 U6.Y13 U6.Y14 U6.Y15 U6.Y16 U6.Y17 U6.Y18 U6.Y19 U6.Y20 U6.Y21 U6.Y22 U7.19 U9.2 U9.3 U9.5 U9.6 U9.7 U11.2 U11.3 U11.5 U11.6 U11.7 X1.1 X2.1
copper on no net: | length 369.5
  L1 w10: v3(2783.46,555.12) 2783.46,590.98
  L1 w19.68: v1(1448.82,1492.13) 1466.97,1473.98 ; v1(1527.56,1255.91) 1545.71,1237.76 ; v1(1531.5,1413.39) 1549.65,1395.24 ; v1(1610.24,1334.65) 1628.39,1316.5 ; v1(1610.24,1492.13) 1628.39,1473.98 ; v1(1645.67,1137.8) 1663.82,1119.65 ; v1(1688.98,1295.28) 1707.13,1277.13 ; 1938.54,1041.77 v1(1956.69,1023.62) ; 2021.22,923.66 v1(2039.37,905.51) ; 2021.22,1119.65 v1(2039.37,1137.8) ; 2096.02,844.92 v1(2114.17,826.77) ; 2096.02,1198.39 v1(2114.17,1216.54) ; 2099.96,1041.77 v1(2118.11,1023.62)
  other v1: 956.69,944.88 976.38,944.88 996.06,944.88 1015.75,944.88 1035.43,944.88 1055.12,944.88 1074.8,944.88
  other v2: 1614.17,448.82 1645.67,448.82 1677.17,448.82 1740.16,448.82 1614.17,480.31 1645.67,480.31 1677.17,480.31 1708.66,480.31 1740.16,480.31 1771.65,480.31 1803.15,480.31 1614.17,511.81 1645.67,511.81 1677.17,511.81 1708.66,511.81 1740.16,511.81 1771.65,511.81 1803.15,511.81 1775.59,539.37
  other v5: 984.25,137.8 3740.16,137.8 984.25,1665.35 3740.16,1665.35

## Polygon pours and split planes (outlines as drawn)
no net on L3(GND) (split plane): 4842.47,0.05 0.05,0.05 0.05,1803.1 4842.47,1803.1
no net on L4(PWR) (split plane): 4803.07,39.45 39.45,39.45 39.45,1763.7 4803.07,1763.7
no net on L5(GND) (split plane): 4842.47,0.05 0.05,0.05 0.05,1803.1 4842.47,1803.1

## Other copper
L1:
  region: 287.4,728.35
  region: 287.4,728.35
  region: 287.4,728.35

## Silkscreen, mask and mechanical layers (free items; w line width, h text height)
Mechanical 1:
  the board outline again, w2

## Text inside footprints (layer, text, board x,y; h text height)
CN1: Top Overlay "USB connector face side" at 93.79,942.18 h19.68 r270